# Allegro board Munteanu Lorena-Nicoleta 433E PDCE I 2023-2024.brd
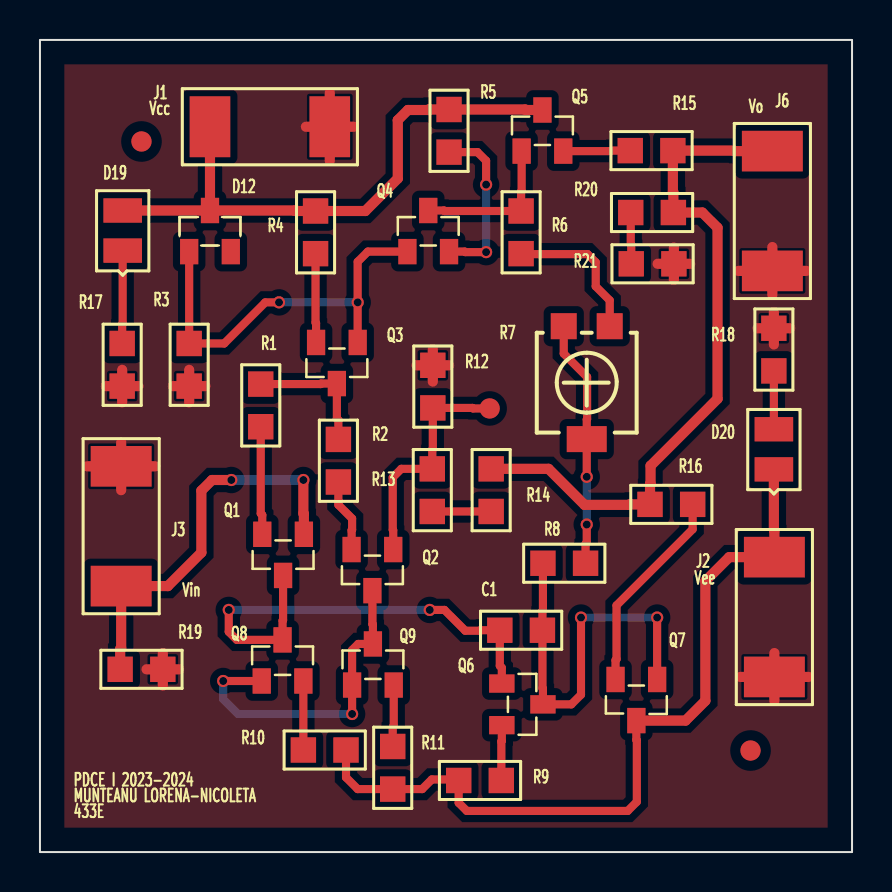
[diagram p0: board, top side]
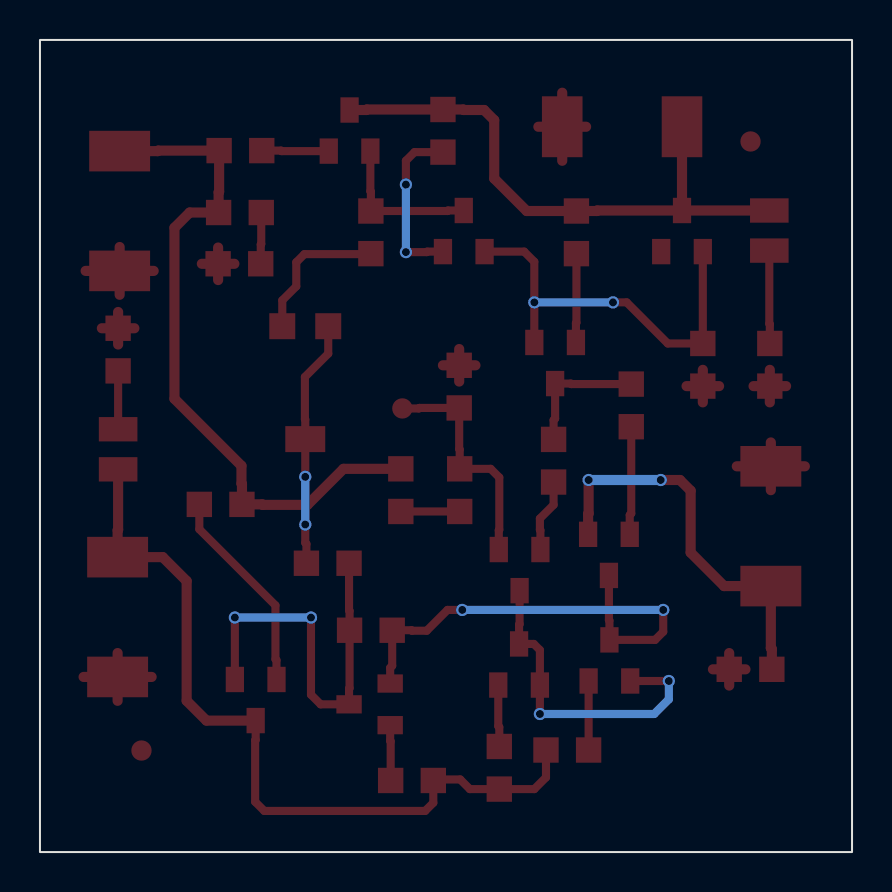
[diagram p1: board, bottom side, seen from below]

Outline 40.64 x 40.64 mm; copper layers: TOP, BOTTOM. Coordinates in mm from the lower left corner of the outline.
Outline path: rectangle 0,0 40.64,40.64

## Design rules (mm)
nets with their own width: min track width 0.406; nets N135311 N135317 N135445 N135451 N135459 N135495 N135661 N135689 N135767 N135881 N135887 N135943 N135949 N136049 N136053 N136153 N136179 N136273 N136375 N136381 N136435 N138341 VCC VEE VIN
nets with their own width: min track width 0.508; nets GND VO

## Placement (name value [footprint] x y rotation side)
C1  47p  [SMC0805]  25.15 11.1 180 top
D12  BZX84-C5V1  [TO236AA]  7.47 30.05 270 top
D19  SMLS14BET  [SMD080521]  4.14 32.11 90 top
D20  SMLS14BET  [SMD080521]  36.73 21.16 90 top
J1  CON2  [SMR2512]  8.51 36.3 0 top
J2  CON2  [SMR2512]  36.75 14.76 270 top
J3  CON2  [SMR2512]  4.06 13.31 90 top
J4  CON1  [TP100]  22.5 22.2 0 top
J6  CON2  [SMR2512]  36.65 35.08 270 top
NOREF  -  []  0 40.82 0 top
NOREF#2  -  [unnamed#2]  5.08 35.56 0 top
NOREF#3  -  []  40.82 0 90 top
NOREF#4  -  [unnamed#2]  35.56 5.08 0 top
Q1  QBC856B  [TO236AA]  13.21 15.9 90 top
Q2  QBC856B  [TO236AA]  17.68 15.14 90 top
Q3  QBC856B  [TO236AA]  15.9 25.5 90 top
Q4  QBC856B  [TO236AA]  18.39 30.05 270 top
Q5  QBC846B  [TO236AA]  24.1 35.08 270 top
Q6  QBC846B  [TO236AA]  23.11 8.43 180 top
Q7  QBC856B  [TO236AA]  30.89 8.64 90 top
Q8  QBC846B  [TO236AA]  11.1 8.56 270 top
Q9  QBC846B  [TO236AA]  15.62 8.36 270 top
R1  68  [SMR0805]  11.05 21.29 90 top
R2  68  [SMR0805]  14.94 18.52 90 top
R3  4k  [SMR0805]  7.47 23.32 90 top
R4  820  [SMR0805]  13.79 29.95 90 top
R5  470  [SMR0805]  20.47 35.03 90 top
R6  10  [SMR0805]  24.08 29.95 90 top
R7  100  [TS53YL]  26.21 26.31 90 top
R8  10  [SMR0805]  25.17 14.45 0 top
R9  22  [SMR0805]  20.95 3.58 0 top
R10  82  [SMR0805]  15.32 5.11 180 top
R11  82  [SMR0805]  17.65 3.15 90 top
R12  1k  [SMR0805]  19.66 24.36 270 top
R13  2.2k  [SMR0805]  19.63 17.04 90 top
R14  6.8k  [SMR0805]  22.58 19.18 270 top
R15  1  [SMR0805]  31.67 35.1 180 top
R16  1  [SMR0805]  30.53 17.4 0 top
R17  1.5k  [SMR0805]  4.11 23.32 90 top
R18  1.5k  [SMR0805]  36.73 26.21 270 top
R19  220k  [SMR0805]  4.01 9.14 0 top
R20  33  [SMR0805]  29.57 32 0 top
R21  51  [SMR0805]  31.72 29.44 180 top

## Library data of the parts
C1 = C
D12 = BZX84-C5V1_4
D19 D20 = SMLS14BET_0
J1-J3 J6 = CON2
J4 = CON1
Q1-Q4 Q7 = QBC856B_0
Q5 Q6 Q8 Q9 = QBC846B_0
R1-R6 R8-R21 = R
R7 = POT

## Footprints (pads in the part's own frame, mm; a bottom-side part is the same pattern mirrored in y, then rotated)
SMC0805
  rect 1.27x1.27 smd: 1(0,0) 2(2.134,0)
SMD080521
  rect 1.219x1.93 smd: 1(0,0) 2(-2.007,0)
SMR0805
  rect 1.27x1.27 smd: 1(0,0) 2(2.134,0)
SMR2512
  rect 2.032x3.048 smd: 1(0,0) 2(5.994,0)
TO236AA
  rect 1.27x0.914 smd: 1(0,0) 2(0,2.083) 3(-2.057,1.041)
TP100
  round 1.016 smd: 1(0,0)
TS53YL
  rect 1.3x1.3 smd: 1(0,0) 3(0,-2.3)
  rect 1.3x2 smd: 2(-5.65,-1.15)
unnamed#2
  round 1.016 smd: (0,0)

## Nets
GND: J1.2 J2.2 J3.2 J6.2 R3.1 R12.1 R17.1 R18.1 R19.2 R21.1
VCC: D12.3 D19.1 J1.1 Q5.3 R4.2 R5.2
VEE: D20.2(C) J2.1 Q7.3 R9.1 R10.1 R11.1
VIN: J3.1 Q1.1 R19.1
VO: J6.1 R14.1 R15.1 R16.1 R20.2
N135311: Q4.2(E) R5.1
N135317: D19.2(C) R17.2
N135445: Q3.2(E) R4.1
N135451: D12.1 Q3.1 Q4.1 R3.2
N135459: Q4.3 Q5.1 R6.2
N135495: Q5.2(E) R15.2
N135661: Q3.3 R1.2 R2.2
N135689: R6.1 R7.3
N135767: R7.1 R7.2(T) R8.2
N135881: Q1.2(E) R1.1
N135887: Q2.2(E) R2.1
N135943: J4.1 Q2.1 R12.2 R13.2
N135949: R13.1 R14.2
N136049: C1.2 Q1.3 Q6.1 Q8.3
N136053: Q2.3 Q8.1 Q9.1 Q9.3
N136153: Q7.2(E) R16.2
N136179: C1.1 Q6.3 Q7.1 R8.1
N136273: D20.1 R18.2
N136375: Q8.2(E) R10.2
N136381: Q9.2(E) R11.2
N136435: Q6.2(E) R9.2
N138341: R20.1 R21.2

Pads without a net: D12 2

## Via types
v1: diameter 0.61, hole 0.4, TOP to BOTTOM, 14 vias

## Routing (per net, layer and track width the routed paths; a pad name or vN(x,y) marks a point on that pad's centre or on a via; arc(x,y) is an arc through that point)
GND: length 42.7
  TOP w0.508: R3.1 8.28,23.32 ; R3.1 6.65,23.32 ; R3.1 7.47,24.13 ; R3.1 7.47,22.5 ; R17.1 4.11,24.13 ; R17.1 4.11,22.5 ; R17.1 3.3,23.32 ; R17.1 4.93,23.32 ; R19.2 6.96,9.14 ; R19.2 6.15,8.33 ; R19.2 5.33,9.14 ; R19.2 6.15,9.96 ; R12.1 20.47,24.36 ; R12.1 18.85,24.36 ; R12.1 19.66,25.17 ; R12.1 19.66,23.55 ; 36.65,27.89 J6.2 ; J6.2 36.65,30.28 ; J6.2 34.95,29.08 ; J6.2 38.35,29.08 ; 2.36,19.3 J3.2 ; J3.2 4.06,18.11 ; J3.2 4.06,20.5 ; J3.2 5.77,19.3 ; J2.2 36.75,9.96 ; J2.2 35.05,8.76 ; J2.2 38.46,8.76 ; J2.2 36.75,7.57 ; R18.1 37.54,26.21 ; R18.1 35.92,26.21 ; R18.1 36.73,27.03 ; R18.1 36.73,25.4 ; 14.5,34.59 J1.2 ; J1.2 14.5,38 ; J1.2 15.7,36.3 ; J1.2 13.31,36.3 ; 31.72,28.63 R21.1 ; R21.1 30.91,29.44 ; R21.1 31.72,30.25 ; R21.1 32.54,29.44
VCC: length 29
  TOP w0.508: D12.3 J1.1 ; D12.3 D19.1 ; D12.3 12.75,32.11 12.78,32.08 R4.2 16.28,32.08 17.91,33.71 17.91,36.63 18.41,37.13 19.43,37.13 19.46,37.16 R5.2 24.28,37.16 24.31,37.13 Q5.3
VEE: length 40.2
  TOP w0.406: R10.1 15.32,3.73 15.9,3.15 R11.1 19.13,3.15 19.61,3.63 20.9,3.63 R9.1 20.95,2.46 21.36,2.06 29.41,2.06 29.87,2.51 29.87,5.59 29.84,5.61 Q7.3
  TOP w0.508: Q7.3 32.31,6.58 33.3,7.57 33.3,13.56 34.49,14.76 J2.1 36.75,16.1 36.73,16.13 D20.2
VIN: length 20
  TOP w0.508: v1(9.58,18.62) 8.61,18.62 8.08,18.08 8.08,14.99 6.4,13.31 J3.1 4.06,10.21 4.01,10.16 R19.1 ; Q1.1 13.21,16.92 13.18,16.94 v1(13.18,18.62)
  BOTTOM w0.508: v1(9.58,18.62) v1(13.18,18.62)
VO: length 34.6
  TOP w0.508: J6.1 34.75,35.08 34.72,35.1 R15.1 31.67,33.05 31.7,33.02 R20.2 33.15,32 33.91,31.24 33.91,22.68 30.56,19.33 30.56,18.44 30.53,18.41 R16.1 29.51,17.4 29.49,17.37 27.25,17.37 25.45,19.18 R14.1
N135311: length 8.5
  TOP w0.406: R5.1 21.89,35.03 22.33,34.59 v1(22.33,33.4) ; Q4.2 21.26,30.05 21.29,30.02 v1(22.33,30.02)
  BOTTOM w0.406: v1(22.33,33.4) v1(22.33,30.02)
N135317: length 4.7
  TOP w0.406: R17.2 4.11,26.42 4.14,26.44 D19.2
N135445: length 4.5
  TOP w0.406: R4.1 13.79,26.49 13.82,26.47 Q3.2
N135451: length 20.6
  TOP w0.406: Q4.1 16.41,30.05 15.9,29.54 v1(15.9,27.51) Q3.1 ; D12.1 R3.2 9.22,25.45 11.28,27.51 v1(11.96,27.51)
  BOTTOM w0.406: v1(11.96,27.51) v1(15.9,27.51)
N135459: length 7.7
  TOP w0.406: Q5.1 24.1,33.07 24.08,33.05 R6.2 20.24,32.08 20.22,32.11 Q4.3
N135495: length 3.4
  TOP w0.406: Q5.2 28.55,35.08 28.57,35.1 R15.2
N135661: length 6.6
  TOP w0.406: R1.2 14.05,23.42 14.07,23.44 Q3.3 14.86,21.69 14.94,21.62 R2.2
N135689: length 7.4
  TOP w0.406: R7.3 28.51,27.61 27.81,28.31 27.81,29.51 27.41,29.92 24.1,29.92 R6.1
N135767: length 12.4
  TOP w0.406: R7.1 26.21,24.94 27.38,23.77 27.38,21.66 27.36,21.64 R7.2 v1(27.36,18.78) ; v1(27.36,16.39) 27.36,15.48 27.3,15.42 R8.2
  BOTTOM w0.406: v1(27.36,18.78) v1(27.36,16.39)
N135881: length 5.4
  TOP w0.406: Q1.2 11.13,16.87 11.05,16.94 R1.1
N135887: length 3.7
  TOP w0.406: Q2.2 15.6,16.1 15.62,16.13 15.62,16.69 14.94,17.37 R2.1
N135943: length 11.7
  TOP w0.406: Q2.1 17.68,16.1 17.65,16.13 17.65,18.75 18.08,19.18 R13.2 19.63,20.14 19.66,20.17 R12.2 21.65,22.23 21.67,22.2 J4.1
N135949: length 2.9
  TOP w0.406: R14.2 R13.1
N136049: length 23.9
  TOP w0.406: v1(19.51,12.12) 20.24,12.12 21.29,11.07 22.02,11.07 22.05,11.1 C1.2 23.01,9.32 23.11,9.22 Q6.1 ; v1(9.45,12.12) 9.45,11.02 9.86,10.62 Q8.3 12.14,11.58 12.17,11.61 Q1.3
  BOTTOM w0.406: v1(9.45,12.12) v1(19.51,12.12)
N136053: length 16.6
  TOP w0.406: Q8.1 v1(9.17,8.56) ; 16.64,13.08 16.64,11.4 16.66,11.38 Q9.3 15.93,10.41 15.62,10.11 Q9.1 v1(15.62,6.91)
  BOTTOM w0.406: v1(15.62,6.91) 9.91,6.91 9.17,7.65 v1(9.17,8.56)
N136153: length 10.4
  TOP w0.406: Q7.2 28.8,9.6 28.85,9.65 28.85,12.34 32.66,16.15 R16.2
N136179: length 20
  TOP w0.406: R8.1 25.17,12.09 25.15,12.06 C1.1 25.15,8.2 25.17,8.18 Q6.3 26.59,7.39 27.08,7.87 v1(27.08,11.73) ; v1(30.89,11.73) Q7.1
  BOTTOM w0.406: v1(27.08,11.73) v1(30.89,11.73)
N136273: length 2.9
  TOP w0.406: R18.2 D20.1
N136375: length 3.5
  TOP w0.406: Q8.2 R10.2
N136381: length 3.1
  TOP w0.406: Q9.2 17.7,6.3 17.65,6.25 R11.2
N136435: length 2.8
  TOP w0.406: R9.2 23.09,5.54 23.11,5.56 Q6.2
N138341: length 2.6
  TOP w0.406: 29.59,29.44 29.59,30.4 29.57,30.43 R20.1

## Copper pours and planes (outline as drawn; the poured copper is in the pictures)
GND on TOP: 1.22,1.22 1.22,39.42 39.42,39.42 39.42,1.22

## Text on the board
Ref Des/Silkscreen Top: PDCE I 2023-2024 | MUNTEANU LORENA-NICOLETA | 433E | Vcc | Vin | Vee | Vo
XSECTION_CHART: *  SURFACE | L1 TOP CONDUCTOR | *  DIELECTRIC | L2 BOTTOM CONDUCTOR | DESIGN CROSS SECTION CHART | ___________________________ | TOTAL THICKNESS 10.4 MIL | 1-2
DIMENSION: FIGURE | FINISHED_SIZE | 15.75 | DRILL CHART: TOP to BOTTOM | ALL UNITS ARE IN MILS | PLATED | QTY | 14 | TOTAL HOLES:
